# Altium PCB PCB.PcbDoc
Units mil, origin at the board's own origin, x right, y up, seen from the top; angles counter-clockwise.
Board outline 2269.48 x 3798.77 mil, 2 copper layers (Top Layer, Bottom Layer); 58 components, 64 nets, 420 pads, 139 vias.
Unrouted connection lines stored in the file: 11.
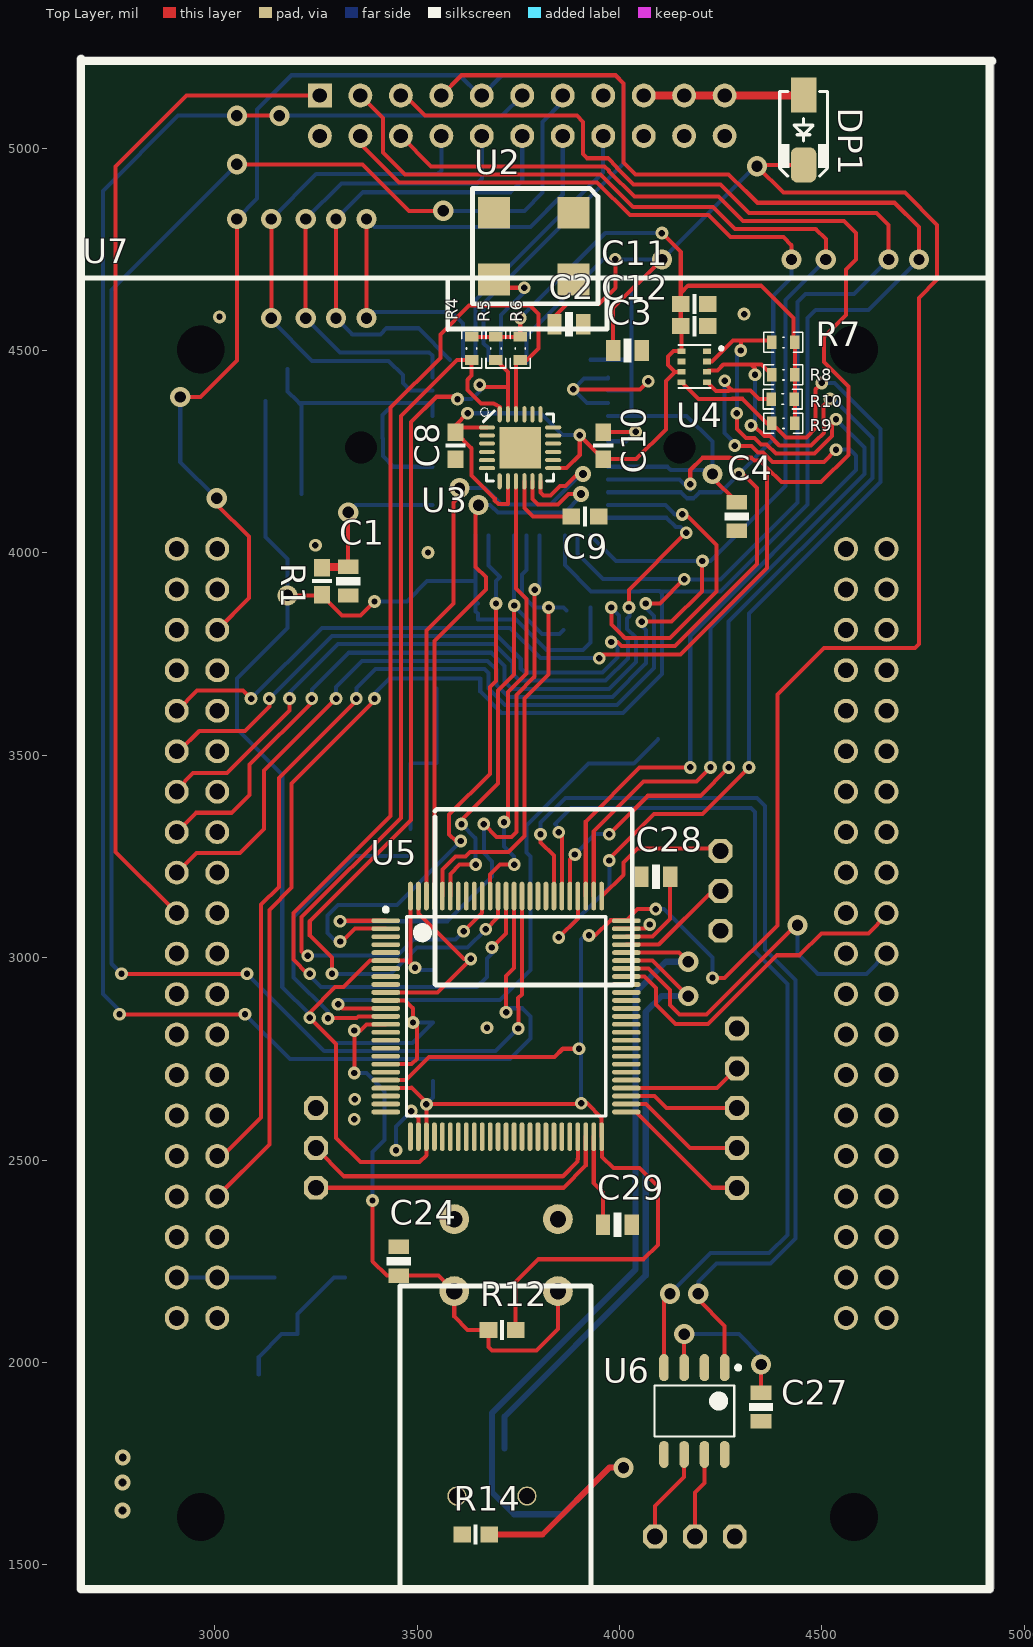
[diagram p0: Top Layer view]
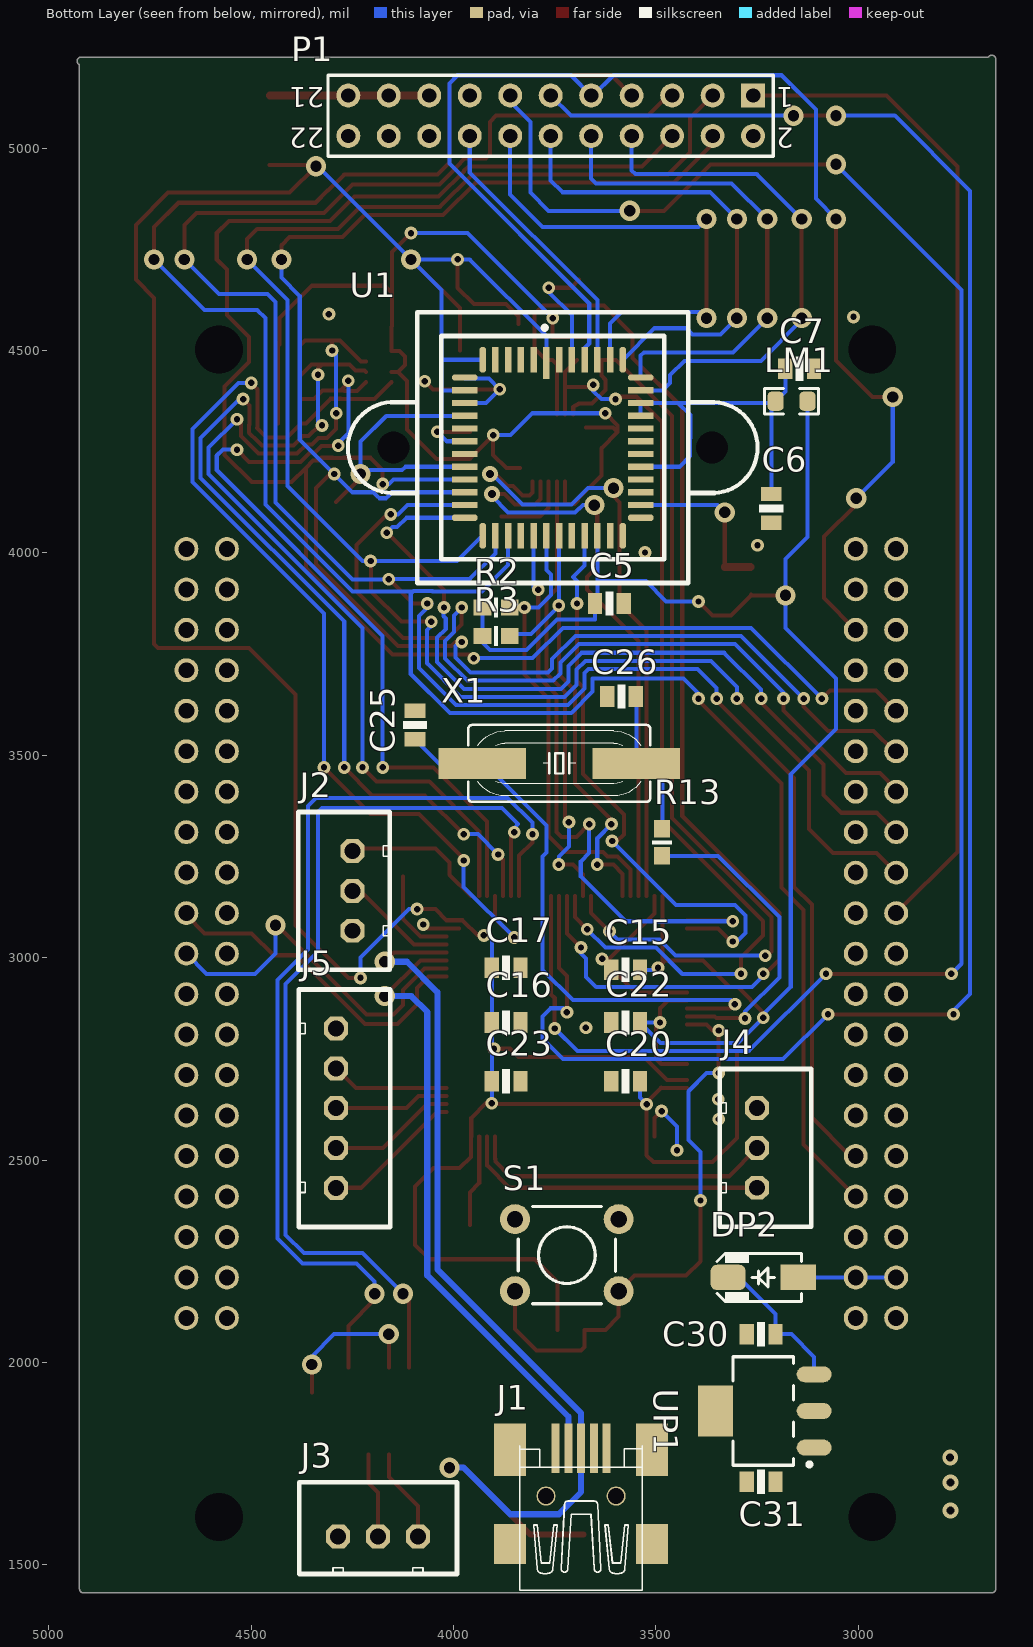
[diagram p1: Bottom Layer view, seen from below]

## Layer stack, top to bottom
Top Solder: solder mask 0.4, Solder Resist, Dk 3.5
Top Layer: signal copper 1.4
Dielectric 1: dielectric 12.6, FR-4, Dk 4.8
Bottom Layer: signal copper 1.4
Bottom Solder: solder mask 0.4, Solder Resist, Dk 3.5

## Board outline
2660.38,1440.71 ccw(c2670.24,1440.71) 2670.24,1430.85 4914.33,1430.85 ccw(c4914.33,1440.71) 4924.19,1440.71 4924.19,5206.08 ccw(c4920,5215) 4929.86,5215 ccw(c4920,5215) 4920,5224.86 2678.68,5224.86 ccw(c2670.24,5219.76) 2660.38,5219.76

## Design rules (kind name [scope] priority, off if disabled: settings)
Clearance [All] p1: gap=10 ignorepadtopadclearanceinfootprint=FALSE except(0: Arc-Hole Track-Hole SMDPad-Hole THPad-Hole Via-Hole Fill-Hole Poly-Hole Region-Hole Text-Hole)
DiffPairsRouting [All] p1: maxlimit=10 minlimit=10 mostfreqgap=10 toplayer_minwidth=10 toplayer_maxwidth=15 toplayer_prefwidth=15 bottomlayer_minwidth=15 bottomlayer_maxwidth=15 bottomlayer_prefwidth=15 maxuncoupledlength=500
PolygonConnect [All] p1: connectstyle=Relief reliefconductorwidth=10 reliefentries=4 polygonreliefangle="90 Angle" airgapwidth=10
RoutingVias [All] p1: holewidth=28 width=50 viastyle="Through Hole" minholewidth=28 minwidth=50 maxholewidth=28 maxwidth=50
SolderMaskExpansion [All] p1: expansion=4
Width [All] p1: maxlimit=10 minlimit=10 preferedwidth=10
29 further rules are at their usual default settings.

## Classes and differential pairs
component class Camera_Schematics: C1 C2 C3 C4 C5 C6 C7 DP1 LM1 P1 R1 R2 R3 U1 U2
component class IMU_Schematics: C8 C9 C10 C11 C12 R4 R5 R6 R7 R8 R9 R10 U3 U4
component class STM32F4_Schematics: C15 C16 C17 C20 C22 C23 C24 C25 C26 C27 C28 C29 J1 J2 J3 J4 J5 R12 R13 R14 S1 U5 U6 X1
component class USB3_Controller_Schematics: C30 C31 DP2 U7 UP1
differential pair USB: +USB_P -USB_N

## Components (designator, comment, footprint, x,y, rotation, side; value= is the part's Value field where it differs from the comment)
C1 "Cap" _0805 3330,3930 r270 top value=100nF
C2 "Cap" _0805 3875,4565 r180 top value=100nF
C3 "Cap" _0805 4020,4500 r180 top value=100nF
C4 "Cap" _0805 4290,4090 r90 top value=100nF
C5 "Cap" _0805 3615,3875 r0 bottom value=100nF
C6 "Cap" _0805 3215,4110 r90 bottom value=100nF
C7 "Cap" _0805 3145,4454.76 r0 bottom value=100nF
C8 "Cap" _0603 3595,4265 r90 top value=100nF
C9 "Cap" _0603 3915,4090 r180 top value=100nF
C10 "Cap" _0603 3960,4265 r270 top value=100nF
C11 "Cap" _0603 4185,4560 r0 top value=100nF
C12 "Cap" _0603 4185,4615 r0 top value=100nF
C15 "Cap" _0805 3575,2970 r180 bottom value=100nF
C16 "Cap" _0805 3870,2840 r0 bottom value=100nF
C17 "Cap" _0805 3870,2975 r0 bottom value=100nF
C20 "Cap" _0805 3575,2695 r180 bottom value=100nF
C22 "Cap" _0805 3575,2840 r180 bottom value=1uF
C23 "Cap" _0805 3870,2695 r0 bottom value=100nF
C24 "Cap" _0805 3455,2250 r90 top value=100nF
C25 "Cap" _0805 4095,3575 r90 bottom value=27PF
C26 "Cap" _0805 3585,3645 r0 bottom value=27PF
C27 "Cap" _0805 4350,1890 r90 top value=100nF
C28 "Cap" _0805 4090,3200 r0 top value=100nF
C29 "Cap" _0805 3995,2340 r180 top value=100nF
C30 "Cap" _0805 3240,2070 r0 bottom value=100nF
C31 "Cap" _0805 3240,1705 r180 bottom value=100nF
DP1 "1N5819" 430X270D 4455,5045 r270 top
DP2 "1N5819" 430X270D 3235,2210 r0 bottom
J1 "Mini_USB" My_USB 3685,1670 r90 bottom
J2 "SWD" XH_3PIN 4157.48,2970.12 r90 bottom
J3 "XH_3PIN" XH_3PIN 4381.46,1477.48 r180 bottom
J4 "AUX_UART" XH_3PIN 3342.52,2724.88 r270 bottom
J5 "AUX_SPI" XH_5PIN 4382.52,2921.46 r270 bottom
LM1 "10uH" 0805L 3165,4374.76 r0 bottom value=FB805
P1 "FPGA VIDEO" HDR2X11 3260,5130 r0 bottom
R1 "Resistor" _0603 3265,3930 r270 top value=100K
R2 "Resistor" _0603 3895,3865 r0 bottom value=1.5K
R3 "Resistor" _0603 3895,3795 r0 bottom value=1.5K
R4 "10k" RES0603 3635,4505 r90 top
R5 "10k" RES0603 3695,4505 r90 top
R6 "10k" RES0603 3755,4505 r90 top
R7 "4.7k" RES0603 4405,4520 r180 top
R8 "4.7k" RES0603 4405,4440 r180 top
R9 "4.7k" RES0603 4405,4320 r180 top
R10 "4.7k" RES0603 4403.54,4380 r180 top
R12 "Resistor" _0603 3710,2080 r180 top value=100K
R13 "Resistor" _0603 3485,3285 r270 bottom value=220R
R14 "Resistor" _0603 3645,1575 r180 top value=1K
S1 "PushButton-4Pin" _TACTILE_SWITCH_PTH_6.0MM 3720,2265 r0 bottom
U1 "MT9V034" MT9V034 3755,4260 r180 bottom
U2 "XTALL_SMD" XTAL_SMD 3886.85,4840.35 r180 top
U3 "MPU-9250" _QFN-24-EP 3754.21,4260.39 r0 top
U4 "BMP280" *XDCR_BMP280 4185,4460 r0 top
U5 "STM32F407VGT6" STM-LQFP100_N 3720,2855 r0 top
U6 "TJA1051" SO-8N 4185,1880 r270 top
U7 "EZ_FX3" EZ_FX3 2906.46,2110 r0 top locked
UP1 "LM1117IMP-x.x" SOT223_4 3235,1880.12 r0 bottom
X1 "Crystal_1" _CRYSTAL-HC49UP 3738.68,3480 r0 bottom value=8MHZ

## Footprints (in the part's own frame and the unit in brackets; to place one, negate y for a bottom-side part, rotate by r counter-clockwise, add the part's x,y. Pads: shape width x height; smd on the part's side, far side on the other; paste and mask are expansions set on the pad)
430X270D [mm] "SMA Molded Diode, 2-Leads, Body 4.3x2.7mm"
  rect 2.2x1.6 smd: 1(-2.2,0)
  rrect50% 2.2x1.6 smd: 2(2.2,0)
  silkscreen extent -2.4,-1.5 2.9,1.5, body extent -2.75,-1.4 2.75,1.4, height 2.6
0805L [mm] ",0805, 2012, 200X130"
  rrect50% 1x1.2 smd mask+0.075: 1(-1,0) 2(1,0)
  Top Layer pour cut-out: -0.5,0.8 0.5,0.8 0.5,-0.8 -0.5,-0.8
  silkscreen extent -1.7,-0.8 1.7,0.8, body extent -1,-0.6 1,0.6, height 0.95
*XDCR_BMP280 [mm]
  rect 0.5x0.35 smd: 1(0.8,0.975) 2(0.8,0.325) 3(0.8,-0.325) 4(0.8,-0.975) 5(-0.8,-0.975) 6(-0.8,-0.325) 7(-0.8,0.325) 8(-0.8,0.975)
  silkscreen extent -1,-1.35 1.8,1.35
_0603 [mm]
  rect 1.1x1 smd: 1(-0.85,0) 2(0.85,0)
  silkscreen extent -0.13,-0.64 0.13,0.64
_0805 [mm]
  rect 0.9x1.3 smd: 1(-0.9,0) 2(0.9,0)
  silkscreen extent -0.25,-0.76 0.25,0.76
_CRYSTAL-HC49UP [mil]
  rect 216.54x76 smd: 1(-190,0) 2(190,0)
  silkscreen extent -225,-95 225,95
_QFN-24-EP [mil]
  rrect100% 40x10 smd: 1(-81.35,49.48) 2(-81.35,29.51) 3(-81.35,9.74) 4(-81.35,-11.32) 5(-81.35,-31.19) 6(-81.35,-51.05) 13(82.13,-51.05) 14(82.13,-31.19) 15(82.13,-11.32) 16(82.13,9.74) 17(82.13,29.51) 18(82.13,49.48)
  rrect100% 10x40 smd: 7(-49.87,-83.53) 8(-30,-83.53) 9(-10.14,-83.53) 10(10.93,-83.53) 11(30.69,-83.53) 12(50.66,-83.53) 19(50.66,81.95) 20(30.69,81.95) 21(10.93,81.95) 22(-10.14,81.95) 23(-30,81.95) 24(-49.87,81.95)
  rect 103x103 smd: P$1(0.79,-0.39)
  silkscreen extent -98,-83 83,98
_TACTILE_SWITCH_PTH_6.0MM [mil]
  round 74 hole 40: 1(-128,89) 2(128,89) 3(-128,-89) 4(128,-89)
  silkscreen extent -120,-120 120,120
EZ_FX3 [mm]
  round 1.5 hole 3: 2(1.5,-12.5) 2(1.5,60.76) 2(42.5,-12.5) 2(42.5,60.76)
  round 1.5 hole 1: 4(0,7.62) 5(0,10.16) 6(0,12.7) 7(0,15.24) 8(0,17.78) 9(0,20.32) 10(0,22.86) 11(0,25.4) 12(0,27.94) 13(0,30.48) 14(0,33.02) 15(0,35.56) 16(0,38.1) 17(0,40.64) 18(0,43.18) 19(0,45.72) 20(0,48.26) 24(2.54,7.62) 25(2.54,10.16) 26(2.54,12.7) 27(2.54,15.24) 28(2.54,17.78) 29(2.54,20.32) 30(2.54,22.86) 31(2.54,25.4) 32(2.54,27.94) 33(2.54,30.48) 34(2.54,33.02) 35(2.54,35.56) 36(2.54,38.1) 38(2.54,43.18) 40(2.54,48.26) 43(42,5.08) 44(42,7.62) 45(42,10.16) 46(42,12.7) 47(42,15.24) 48(42,17.78) 49(42,20.32) 50(42,22.86) 51(42,25.4) 52(42,27.94) 53(42,30.48) 54(42,33.02) 55(42,35.56) 56(42,38.1) 57(42,40.64) 58(42,43.18) 59(42,45.72) 62(44.54,2.54) 64(44.54,7.62) 65(44.54,10.16) 66(44.54,12.7) 70(44.54,22.86) 71(44.54,25.4) 72(44.54,27.94) 74(44.54,33.02) 76(44.54,38.1) 77(44.54,40.64) 78(44.54,43.18) 79(44.54,45.72) GND(0,5.08) GND(2.54,5.08) GND(2.54,40.64) GND(2.54,45.72) GND(42,48.26) GND(44.54,15.24) GND(44.54,17.78) GND(44.54,20.32) GND(44.54,30.48) GND(44.54,35.56) GND(44.54,48.26) NC(44.54,5.08) V_1.2v(0,0) V_1.2v(42,0) V_3.3v(2.54,0) V_3.3v(44.54,0) V_BUS(0,2.54) V_BUS(2.54,2.54) VIO(42,2.54)
  silkscreen extent -6,-17 51,65.26
HDR2X11 [mm] "Connector; Header; 11x2 Position"
  rect 1.5x1.5 hole 0.9: 1(0,0)
  round 1.5 hole 0.9: 2(0,2.54) 3(2.54,0) 4(2.54,2.54) 5(5.08,0) 6(5.08,2.54) 7(7.62,0) 8(7.62,2.54) 9(10.16,0) 10(10.16,2.54) 11(12.7,0) 12(12.7,2.54) 13(15.24,0) 14(15.24,2.54) 15(17.78,0) 16(17.78,2.54) 17(20.32,0) 18(20.32,2.54) 19(22.86,0) 20(22.86,2.54) 21(25.4,0) 22(25.4,2.54)
  silkscreen extent -1.27,-1.27 26.67,3.81
MT9V034 [mm]
  rect 0.4x2 smd: 1(-0.4,5.315)
  rect 0.4x1.6 smd: 2(-1.2,5.515) 3(-2,5.515) 4(-2.8,5.515) 5(-3.6,5.515) 20(-3.6,-5.515) 21(-2.8,-5.515) 22(-2,-5.515) 23(-1.2,-5.515) 24(-0.4,-5.515) 25(0.4,-5.515) 26(1.2,-5.515) 27(2,-5.515) 28(2.8,-5.515) 29(3.6,-5.515) 44(3.6,5.515) 45(2.8,5.515) 46(2,5.515) 47(1.2,5.515) 48(0.4,5.515)
  oct 0.4x1.6 smd: 6(-4.4,5.515) 19(-4.4,-5.515) 30(4.4,-5.515) 43(4.4,5.515)
  oct 1.6x0.4 smd: 7(-5.515,4.4) 18(-5.515,-4.4) 31(5.515,-4.4) 42(5.515,4.4)
  rect 1.6x0.4 smd: 8(-5.515,3.6) 9(-5.515,2.8) 10(-5.515,2) 11(-5.515,1.2) 12(-5.515,0.4) 13(-5.515,-0.4) 14(-5.515,-1.2) 15(-5.515,-2) 16(-5.515,-2.8) 17(-5.515,-3.6) 32(5.515,-3.6) 33(5.515,-2.8) 34(5.515,-2) 35(5.515,-1.2) 36(5.515,-0.4) 37(5.515,0.4) 38(5.515,1.2) 39(5.515,2) 40(5.515,2.8) 41(5.515,3.6)
  round 0 hole 2: ""(-10,0) ""(10,0)
  silkscreen extent -12.86,-8.5 12.86,8.5
My_USB [mm]
  rect 3.1x0.5 smd: 1(3,1.6) 2(3,0.8) 3(3,0) 4(3,-0.8) 5(3,-1.6)
  rect 2.5x2 smd: 5(-3,-4.45) 5(-3,4.45)
  rect 3.3x2 smd: 5(2.9,-4.45) 5(2.9,4.45)
  round 1.2 hole 1 unplated: ""(0,-2.2) ""(0,2.2)
  silkscreen extent -5.92,-3.85 3.16,3.85
RES0603 [mm] "Chip Resistor, 2-Leads, Body 1/60x0/80mm, IPC Medium Density DESIGNER:ABBAS BASEREH"
  rect 0.6x0.85 smd: 1(-0.725,0) 2(0.725,0)
  silkscreen extent -1.22,-0.63 1.22,0.63, body extent -0.82,-0.43 0.82,0.43, height 0.4
SO-8N [mm] "SOIC, 8-Leads, Body 4/89x3/90mm, Pitch 1/27mm, IPC Medium Density designer:abbas basereh"
  oval 1.7x0.6 smd mask+0.06: 1(-2.725,1.905) 2(-2.725,0.635) 3(-2.725,-0.635) 4(-2.725,-1.905) 5(2.725,-1.905) 6(2.725,-0.635) 7(2.725,0.635) 8(2.725,1.905)
  silkscreen extent -2.85,-2.5 1.6,2.88, body extent -3,-2.5 3,2.5, height 1.5
SOT223_4 [mm] "SOT223, 4-Leads, Body 6.5x3.5mm, Pitch 2.30mm-Designer Abbas Basereh"
  oval 2.2x1 smd: 1(-3.2,2.3) 2(-3.2,0) 3(-3.2,-2.3)
  rect 2.2x3.2 smd: 4(3,0)
  Top Layer pour cut-out: -1.7,3.556 1.7,3.556 1.7,-3.556 -1.7,-3.556
  silkscreen extent -3.02,-3.4 1.9,3.47, body extent -3.5,-3.25 3.5,3.25, height 1.7
STM-LQFP100_N [mm] "Thin QFP, 100-Leads, Body 14x14mm, Pitch 0.5mm, IPC Medium Density"
  oval 1.8x0.3 smd: 1(-7.55,6) 2(-7.55,5.5) 3(-7.55,5) 4(-7.55,4.5) 5(-7.55,4) 6(-7.55,3.5) 7(-7.55,3) 8(-7.55,2.5) 9(-7.55,2) 10(-7.55,1.5) 11(-7.55,1) 12(-7.55,0.5) 13(-7.55,0) 14(-7.55,-0.5) 15(-7.55,-1) 16(-7.55,-1.5) 17(-7.55,-2) 18(-7.55,-2.5) 19(-7.55,-3) 20(-7.55,-3.5) 21(-7.55,-4) 22(-7.55,-4.5) 23(-7.55,-5) 24(-7.55,-5.5) 25(-7.55,-6) 51(7.55,-6) 52(7.55,-5.5) 53(7.55,-5) 54(7.55,-4.5) 55(7.55,-4) 56(7.55,-3.5) 57(7.55,-3) 58(7.55,-2.5) 59(7.55,-2) 60(7.55,-1.5) 61(7.55,-1) 62(7.55,-0.5) 63(7.55,0) 64(7.55,0.5) 65(7.55,1) 66(7.55,1.5) 67(7.55,2) 68(7.55,2.5) 69(7.55,3) 70(7.55,3.5) 71(7.55,4) 72(7.55,4.5) 73(7.55,5) 74(7.55,5.5) 75(7.55,6)
  oval 0.3x1.8 smd: 26(-6,-7.55) 27(-5.5,-7.55) 28(-5,-7.55) 29(-4.5,-7.55) 30(-4,-7.55) 31(-3.5,-7.55) 32(-3,-7.55) 33(-2.5,-7.55) 34(-2,-7.55) 35(-1.5,-7.55) 36(-1,-7.55) 37(-0.5,-7.55) 38(0,-7.55) 39(0.5,-7.55) 40(1,-7.55) 41(1.5,-7.55) 42(2,-7.55) 43(2.5,-7.55) 44(3,-7.55) 45(3.5,-7.55) 46(4,-7.55) 47(4.5,-7.55) 48(5,-7.55) 49(5.5,-7.55) 50(6,-7.55) 76(6,7.55) 77(5.5,7.55) 78(5,7.55) 79(4.5,7.55) 80(4,7.55) 81(3.5,7.55) 82(3,7.55) 83(2.5,7.55) 84(2,7.55) 85(1.5,7.55) 86(1,7.55) 87(0.5,7.55) 88(0,7.55) 89(-0.5,7.55) 90(-1,7.55) 91(-1.5,7.55) 92(-2,7.55) 93(-2.5,7.55) 94(-3,7.55) 95(-3.5,7.55) 96(-4,7.55) 97(-4.5,7.55) 98(-5,7.55) 99(-5.5,7.55) 100(-6,7.55)
  silkscreen extent -7.67,-6.25 6.25,6.82, body extent -7,-7 7,7, height 1.6
XH_3PIN [mm]
  oct 1.5x1.5 hole 1: 1(2.45,2.35) 2(4.95,2.35) 3(7.45,2.35)
  silkscreen extent 0,0 9.9,5.75
XH_5PIN [mm]
  oct 1.5x1.5 hole 1: 1(2.45,2.35) 2(4.95,2.35) 3(7.45,2.35) 4(9.95,2.35) 5(12.45,2.35)
  silkscreen extent 0,0 14.9,5.75
XTAL_SMD [mm]
  rect 2x2 smd: 1(0,0) 2(5,0) 3(5,4.2) 4(0,4.2)
  silkscreen extent -1.52,-1.52 6.35,5.72

## Part data
C1 C2 C3 C4 C5 C6 C7 C8 C9 C10 C11 C12 C15 C16 C17 C20 C22 C23 C24 C25 C26 C27 C28 C29 C30 C31: library part Cap_1
DP1 DP2: "Schottkey Rectifiers", Data=16-12-2016, Designer="Abbas Basereh"
J1: "USB 2.0, Right Angle, SMT, B Type, Receptacle, 5 Position, Black", PackageDocument=27-Jun-2003, ComponentLink1Description="Manufacturer Link", ComponentLink1URL=http://www.tycoelectronics.com/, ComponentLink2Description="Packaging Specification", ComponentLink2URL=http://ecommas.tycoelectronics.com/commerce/DocumentDelivery/DDEController?Action=showdoc&DocId=Customer+Drawing%7F440247%7FD%7Fpdf%7FEnglish%7FC_440247_D.pdf, ContactMaterial="Copper Alloy", ContactPlating="Gold (30)", DatasheetDocument=27-Jun-2003, DrillSize="Corresponds to nominal value.", HousingMaterial=Thermoplastic, PackageReference=440247, PanelGround=Without, PCB_Layout="Complies with manufacturer's recommendation.", Published=15-Jul-2004, Publisher="Altium Limited"
J2 J4: library part XH_3PIN
J5: library part XH_5PIN
LM1: library part "L SMA 0.25W", "Inductor", Code_IEC=1005, Code_JEITA=0402, LatestRevisionDate=29-May-2009, LatestRevisionNote="IPC-7351 Footprint Added.", PackageDescription="Chip Inductor", PackageReference=0402-A, Published=8-Jun-2000, Publisher="Altium Limited"
P1: library part "Header 11X2", "Header, 11-Pin, Dual row", LatestRevisionDate=17-Jul-2002, LatestRevisionNote="Re-released for DXP Platform.", Publisher="Altium Limited"
R4 R5 R6 R7 R8 R9 R10: library part "RES SMD PACKAGE", "TOTAL SMD RESISTOR PACK", Data=2017-3-10, Desc.="RES SMD PAKAGES", Designer="Abbas Basereh"
U2: library part XTAL_SMD
U4: "BMP280 Absolute Barometric Pressure Sensor for Battery Powered Devices 2 x 2.5mm", Package="SMD-8 Bosch Tools", Availability=Unavailable, MF=Bosch, MP=BMP280, Price=None, SnapEDA_Link=https://www.snapeda.com/parts/BMP280/Bosch%20Sensortec/view-part/?ref=snap
U5: "ARM Cortex-M4 32-bit MCU+FPU, 210 DMIPS, 1024 kB Flash, 192 kB Internal RAM, 82 I/Os, 100-pin LQFP, -40 to 85 degC, Tray", I/Os (High Current)=82, Manufacturer=STMicroelectronics, Operating Frequency(F) (Processor speed) (MHz)=168, Supplier Part Number 1=497-11605-ND, Supply Voltage(Vcc) max (V)=3.6, Supply Voltage(Vcc) min (V)=1.8, ComponentLink1Description="Manufacturer URL", ComponentLink1URL=http://www.st.com/web/en/home.html, ComponentLink2Description=Datasheet, ComponentLink2URL=http://www.st.com/st-web-ui/static/active/en/resource/technical/document/datasheet/DM00037051.pdf, ComponentLink3Description="Package Specification", ComponentLink3URL=http://www.st.com/st-web-ui/static/active/en/resource/technical/document/data_brief/DM00071938.pdf, Core="ARM Cortex-M4", D/A Converter=2x12-bit, DatasheetVersion="Rev. 4", FLASH Size (Prog) (kB)=1024, Internal RAM Size (kB)=192, Mounting Technology="Surface Mount", PackageDescription="100-Pin Low Profile Quad Flat Package, 14 x 14 mm Body, 0.5 mm Pitch", PackageReference=LQFP100, PackageVersion="Rev. 1, 06/2013", Packing=Tray, PartNumber=STM32F407VGT6, Supplier 1=Digi-Key, Supplier 2=Farnell, Supplier 3=Newark, Supplier 4=Mouser, Supplier Part Number 2=2064368, Supplier Part Number 3=73T2333, Supplier Part Number 4=511-STM32F407VGT6
UP1: "x.x Volt, 800mA Low-Dropout Linear Regulator, 4-pin SOT-223", Data=16-12-2016, Designer="Abbas Basereh"
S1: PROD_ID=SWCH-13065
U3: PROD_ID=IC-13192

## Via types
v1: diameter 31.5, hole 15.75, Top Layer to Bottom Layer, 100 vias
v2: diameter 50, hole 28, Top Layer to Bottom Layer, 34 vias
v3: diameter 39.37, hole 19.68, Top Layer to Bottom Layer, 5 vias

## Nets (pads, with @x,y where several pads share a name; then routed paths per layer and width w, separated by ;. In a path a pad name is that pad's centre, name@x,y a point inside that pad or via, vN(x,y) a via of type N, cw(c..) or ccw(c..) an arc to the next point about the centre after c; other vN are vias at no path point)
5V: C27.2 U6.3 | length 385.1
  Top Layer w10: U6.3 v2(4160,2070) ; C27.2 v2(4350,1995)
  Bottom Layer w10: v2(4160,2070) 4295,2070 4350,2015 v2(4350,1995)
+5: C30.1 DP2.2 UP1.3 | length 366.2
  Bottom Layer w10: UP1.3 3109.02,2014.02 3165,2070 C30.1 3204.57,2119.57 3295,2210 DP2.2
AUX_CS: J5.5 U5.51 | length 350.3
  Top Layer w10: U5.51 4041.22,2618.78 4228.43,2431.57 J5.5@4290,2431.57
AUX_MISO: J5.3 U5.53 | length 285.1
  Top Layer w10: U5.53 4086.85,2658.15 4116.57,2628.43 J5.3@4290,2628.43
AUX_MOSI: J5.2 U5.54 | length 293.1
  Top Layer w10: U5.54 4240.98,2677.83 J5.2@4290,2726.85
AUX_RXD: J4.3 U5.48 | length 760.5
  Top Layer w10: J4.3 3861.57,2431.57 3916.54,2486.54 3916.54,2486.85 ; 3916.85,2486.85 U5.48
AUX_SCK: J5.4 U5.52 | length 317.7
  Top Layer w10: U5.52 4065.54,2638.46 4174,2530 J5.4@4290,2530
AUX_TXD: J4.2 U5.47 | length 752
  Top Layer w10: J4.2 3320,2460 3860,2460 3896.85,2496.85 3896.85,2502.17 ; 3897.17,2502.17 U5.47
BAR_CS: R7.2 U4.2 U5.77 | length 2292.4
  Top Layer w10: U5.77 3936.54,3311.54 4060,3435 4190,3435 v1(4225,3470) ; U4.2 4228.85,4472.8 4281.06,4525 4300,4525 ; v1(4290,4345) 4290,4306.52 4312.26,4284.25 4334.16,4284.25 4350.15,4268.27 4363.3,4268.27 4386.57,4245 4481.57,4245 4504.25,4267.68 4504.25,4267.74 4522.26,4285.75 4522.32,4285.75 4525,4288.43 4525,4320 v1(4535,4330) ; v1(4300,4500) 4300,4525 ; R7.2@4376.46,4515 4366.46,4525 4300,4525
  Bottom Layer w10: v1(4225,3470) 4225,3815 4605,4195 4605,4260 v1(4535,4330) ; v1(4290,4345) 4290.75,4345.75 4290.75,4490.75 v1(4300,4500)
BAR_SCK: R10.2 U4.4 U5.78 | length 2152.5
  Top Layer w10: U5.78 3916.85,3336.85 4050,3470 v1(4175,3470) ; U4.4 4238.11,4400 4270,4400 4270.75,4400.75 ; v1(4260,4425) 4260,4420 4275,4405 4270.75,4400.75 ; v1(4285,4265) 4285.75,4264.25 4325.88,4264.25 4341.86,4248.27 4355.02,4248.27 4378.28,4225 4505,4225 v1(4535,4255) ; R10.2 4345,4380 4324.25,4400.75 4270.75,4400.75
  Bottom Layer w10: v1(4175,3470) 4175,3795 4585,4205 4585,4240 4570,4255 v1(4535,4255) ; v1(4260,4425) 4259.25,4424.25 4259.25,4295.75 4285,4270 v1(4285,4265)
BAR_SDI: R8.2 U4.3 U5.80 | length 2322.4
  Top Layer w10: U5.80 3877.48,3242.48 v1(3890,3255) ; v1(3975,3305) 4070,3400 4200,3400 v1(4270,3470) ; U4.3 4220.2,4450.91 4242.42,4450.91 4256.52,4465 4325,4465 ; v1(4325,4315) 4331.7,4315 4358.43,4288.27 4371.58,4288.27 4394.85,4265 4473.28,4265 4484.25,4275.97 4484.25,4276.02 4505,4296.77 4505,4316.52 4504.25,4317.26 4504.25,4364.25 v1(4520,4380) ; v1(4335,4440) 4335,4455 4325,4465 ; R8.2 4351.46,4465 4325,4465
  Bottom Layer w10: v1(3890,3255) 3940,3305 v1(3975,3305) ; v1(4270,3470) 4270,3830 4625,4185 4625,4283.48 4528.48,4380 v1(4520,4380) ; v1(4325,4315) 4335,4325 v1(4335,4440)
BAR_SDO: R9.2 U4.5 U5.79 | length 2481.5
  Top Layer w10: v1(3850,3050) 3897.17,3097.17 U5.79 ; v1@3975,3245 4085,3355 4205,3355 v1(4320,3470) ; U4.5 4195.12,4380 4278.28,4380 4279.03,4380.75 4304.25,4380.75 4365,4320 R9.2 4411.46,4285 4461.77,4285 4485,4308.23 4484.25,4308.98 4484.25,4404.25 v1(4500,4420)
  Bottom Layer w10: v1(3850,3050) 3975,3175 v1(3975,3240) ; v1(4320,3470) 4320,3850 4645,4175 4645,4306 4531,4420 v1(4500,4420)
CAM_SCL: R3.1 U1.25 U5.95 | length 1167
  Top Layer w10: U5.95 3582.2,3207.2 3605,3230 v1(3645,3230) ; v1(3610,3330) 3610.02,3340.02 3700,3430 3700,3659.85 3740,3699.85 v1(3740,3870)
  Bottom Layer w10: v1(3610,3330) 3645,3295 v1(3645,3230) ; U1.25 3739.25,3882.46 3740,3881.72 v1(3740,3870) 3738.23,3870 3808.23,3800 3851.54,3800 R3.1@3861.54,3810
CAM_SDA: R2.1 U1.24 U5.96 | length 1177.8
  Top Layer w10: U5.96 3562.52,3217.52 3595,3250 3620,3250 3630.75,3260.75 3725.75,3260.75 3765.75,3300.75 3765.75,3640.75 3825,3700 v1(3825,3865)
  Bottom Layer w10: U1.24 3770.75,3957.75 3759.25,3946.25 3759.25,3895.75 3790,3865 v1(3825,3865) ; v1@3822.5,3857.5 3825,3860 v1(3825,3865) ; R2.1@3869.04,3857.5 R2.1 v1(3825,3865)
CAMERA_RESET: C1.1 R1.1 U1.32 | length 415.8
  Top Layer w10: R1.1 R1.1@3266.97,3965.43 ; C1.1 v2(3330,4100)
  Top Layer w19.68: R1.1@3266.97,3965.43 C1.1
  Bottom Layer w10: v2(3330,4100) 3348.27,4118.27 U1.32
CAN_RX: U5.81 U6.4 | length 2321.5
  Top Layer w10: v1@3845,3315 v1(3850,3310) ; U5.81 v1@3857.8,3310 ; U6.4 4110,2155 v2(4125,2170)
  Bottom Layer w10: v1(3850,3310) 3850,3320.75 3840.37,3330.37 3880,3370 4325,3370 4335,3360 4335,3015 4415,2935 4415,2315 4370,2270 4225,2270 v2(4125,2170)
CAN_TX: U5.82 U6.1 | length 2406.9
  Top Layer w10: v1(3805,3305) 3805,3285 3838.11,3251.89 U5.82 ; v2(4195,2170) 4195,2155 4260,2090 U6.1
  Bottom Layer w10: v1(3805,3305) 3805,3333.48 3866.52,3395 4340,3395 4360,3375 4360,3020 4435,2945 4435,2306.72 4373.28,2245 4240,2245 4195,2200 v2(4195,2170)
CD0: P1.16 U1.45 | length 683.8
  Bottom Layer w10: 3644.53,4625 3644.76,4624.76 ; U1.45 3644.76,4624.76 ; P1.16 3960,4940 3644.76,4624.76
CD1: P1.14 U1.44 | length 1262.2
  Top Layer w10: v2(3375,4580) v2(3375,4825)
  Bottom Layer w10: v2(3375,4580) 3390,4595 3585,4595 3613.27,4566.73 U1.44 ; v2(3375,4825) 3395,4805 3780,4805 3860,4885 P1.14
CD2: P1.12 U1.43 U7.19 | length 1199.2
  Top Layer w10: v2@3292,4580 v2(3300,4580) v2(3300,4825)
  Bottom Layer w10: v2(3300,4580) 3340,4540 3410,4540 3425,4555 3503.9,4555 U1.43 ; v2(3300,4825) 3366,4891 3731,4891 3760,4920 P1.12
CD3: P1.10 U1.42 U7.18 | length 1231.7
  Top Layer w10: v2(3225,4580) v2(3225,4825)
  Bottom Layer w10: v2(3225,4580) 3310,4495 3530,4495 3537.87,4487.13 U1.42 ; v2(3225,4825) 3313,4913 3648,4913 3660,4925 P1.10
CD4: P1.8 U1.41 U7.17 | length 1285.5
  Top Layer w10: v2(3140,4580) v2(3140,4825)
  Bottom Layer w10: v2(3140,4580) 3140,4575 3240.75,4474.25 3429.75,4474.25 3465,4439 3465,4420 3483.27,4401.73 U1.41 ; v2(3140,4825) 3251,4936 3551,4936 3560,4945 P1.8
CD5: P1.6 U1.15 U7.16 | length 4490
  Top Layer w10: U7.16 2956.46,3660 3070,3660 v1(3090,3640) ; P1.6 3535,4955 3963.28,4955 3974.14,4944.14 3974.14,4942.57 4036.72,4880 4245,4880 4305,4820 4555,4820 4585,4790 4585,4725 4560,4700 4560,4587.17 4505.63,4532.8 4505.63,4471.45 4565.75,4411.33 4565.75,4242.26 4498.48,4175 4400,4175 4365,4210 ; v1(3950,3740) 3959.25,3749.25 4151.25,3749.25 4365,3963 4365,4210 ; v1(4175,4170) 4175,4205 4205,4235 4271.52,4235 4272.26,4234.25 4297.74,4234.25 4298.48,4235 4326.85,4235 4333.58,4228.27 4346.73,4228.27 4365,4210
  Bottom Layer w10: v1(3090,3640) 3265,3815 3729.85,3815 3804.85,3740 3805.17,3740.32 v1@3945,3740.32 ; v1@3940,3735.32 v1@3945,3740.32 ; v1(3950,3740) 3945.32,3740 v1@3945.16,3740.16 ; U1.15 4148.74,4181.26 4175,4155 v1(4175,4170) ; v1@3945,3740.32 3945.32,3740.32 v1@3945.16,3740.16 ; v1@3945,3740.32 v1@3945.16,3740.16 ; v1@3945,3740.32 3945,3740 v1@3945.16,3740.16
CD6: P1.4 U1.16 U7.15 | length 4186
  Top Layer w10: U7.15 2912,3510 2962,3560 3075,3560 3135,3620 v1(3135,3640) ; P1.4 3367.5,5022.5 3367.5,5002.5 3455,4915 3945.15,4915 4025.86,4834.29 4220,4834.29 4274.29,4780 4405,4780 4425,4760 v2(4425,4725) ; v1(3980,3780) 3994.95,3780 4004.95,3770 4137,3770 4340,3973 4340,4160 4305,4195 v1(4295,4195)
  Bottom Layer w10: v1(3135,3640) 3290,3795 3628.86,3795 ; 3631,3795 3698.57,3795 3756.25,3737.32 3756.25,3714.75 3766.75,3704.25 3957.74,3704.25 3995,3741.52 3995,3770 3985,3780 v1(3980,3780) ; U1.16 4151.75,4149.76 4162.26,4139.25 4162.46,4139.25 4166.72,4135 4183.28,4135 4187.54,4139.25 4187.74,4139.25 4198.25,4149.76 4249.76,4149.76 v1(4295,4195) 4380,4280 4380,4635 4425,4680 v2(4425,4725)
CD7: P1.2 U1.17 U7.14 | length 2300.5
  Top Layer w10: U7.14 2906.46,3415.46 2947,3456 3030,3456 3185,3611 v1(3185,3640) ; v1(3980,3865) 3980,3823.23 3992.48,3810.75 3992.74,3810.75 4010.75,3792.74 4010.75,3792.48 4013.23,3790 4125,3790 4240,3905 4240,4020 4165,4095 v1(4155,4095)
  Bottom Layer w10: v1(3185,3640) 3185,3655 3305,3775 3690.28,3775 3736.25,3729.03 3736.25,3701.75 3753.75,3684.25 3966.02,3684.25 4020.75,3738.98 4020.75,3782.74 3999.25,3804.23 3999.25,3845.75 v1(3980,3865) ; U1.17 4113.45,4118.27 4136.72,4095 v1(4155,4095)
CD8: P1.1 U1.18 U7.13 | length 4555.2
  Top Layer w10: 2906.46,3110 2755,3261.46 2755,4955 2930,5130 P1.1 ; U7.13 2954.46,3358 3042,3358 3086,3402 3086,3477 3240,3631 v1(3240,3640) ; v1(4023.5,3865) 4023.5,3908.5 v1(4165,4050)
  Bottom Layer w10: v1@3240,3635 v1(3240,3640) 3240,3662 3331.28,3753.28 3683.72,3753.28 3716.25,3720.75 3716.25,3682.03 3734.03,3664.25 3974.3,3664.25 4040.75,3730.7 4040.75,3791.02 4019.25,3812.52 4019.25,3837.74 4025,3843.48 4025,3863.5 v1(4023.5,3865) ; U1.18 4116.66,4086.77 4139.18,4064.25 4150.75,4064.25 v1(4165,4050)
CD9: P1.3 U1.19 U7.12 | length 4533.2
  Top Layer w10: U7.12 2955.46,3259 3063,3259 3122,3318 3122,3462 v1(3300,3640) ; P1.3 3415.47,5074.53 3415.47,4989.53 3470,4935 3953.43,4935 4034.14,4854.29 4230.71,4854.29 4285,4800 4485,4800 4510,4775 v2(4510,4725) ; v1(4055,3830) 4129,3830 4204,3905 4204,3974 4210,3980 v1(4205,3980)
  Bottom Layer w10: v1@3300,3630 v1(3300,3640) 3300,3669 3364.28,3733.28 3674.53,3733.28 3696.25,3711.57 3696.25,3673.75 3725.75,3644.25 3982.59,3644.25 4065.75,3727.41 4065.75,3809.25 4055,3820 v1(4055,3830) ; U1.19 3991.1,3980 v1(4205,3980) 4225,3980 4410,4165 4410,4625 v2(4510,4725)
CEXPOS: U1.23 U5.1 | length 1536.3
  Top Layer w10: v1(3310,3090) 3311.22,3091.22 U5.1 ; v1(3665,3330) 3696.79,3298.21 3733.21,3298.21 3745.75,3310.75 3745.75,3649.03 3790.75,3694.03 v1(3790.75,3909.25) v1@3794.5,3913
  Bottom Layer w10: v1(3310,3090) 3575,3090 3685.75,3200.75 3685.75,3237.74 3665,3258.48 v1(3665,3330) ; v1(3790.75,3909.25) 3797,3909.25 3802.24,3914.5 U1.23
CFV: P1.7 U1.21 U7.24 | length 5565.6
  Top Layer w10: U7.24 3135,2538.54 3135,3118 3190,3173 3190,3430 v1@3395,3635 ; P1.7 3610,5180 3990,5180 4010,5160 4010,4965 4040,4935 4270,4935 4310,4895 4310.86,4895 4340.86,4865 4680,4865 4740,4805 v2(4740,4725)
  Bottom Layer w10: v1@3395,3635 v1(3395,3640) 3395,3653 3432,3690 3656.25,3690 3656.25,3657.18 3709.18,3604.25 4009.25,3604.25 4105.75,3700.75 4105.75,3899.25 4100.75,3904.25 ; U1.21 3865.24,3969.76 3930,3905 4051.52,3905 4052.26,3905.75 4099.25,3905.75 4100.75,3904.25 ; v2(4740,4725) 4615,4600 4485,4600 4465,4580 4465,4120 4249.25,3904.25 4100.75,3904.25
CLED: U1.27 U5.2 | length 1451.8
  Top Layer w10: v1(3310,3040) 3315,3040 3346.54,3071.54 U5.2 ; v1(3608.26,3288.26) 3595.74,3288.26 3579.25,3304.75 3579.25,3353.25 3680,3454 3680,3668.14 3695,3683.14 v1(3695,3875)
  Bottom Layer w10: v1(3310,3040) 3300,3040 3279.25,3060.75 3279.25,3104.25 3305,3130 3450,3130 v1(3608.26,3288.26) ; U1.27 3676.26,3968.74 3705,3940 3695,3930 v1(3695,3875)
CLV: P1.5 U1.20 U7.25 | length 5387.6
  Top Layer w10: U7.25 3020,2510 3115,2605 3115,3131 3159,3175 3159,3444 v1@3350,3635 ; P1.5 3470,5130 3520,5080 3895,5080 3910,5065 3910,4985 3920,4975 3971.57,4975 3994.14,4952.43 3994.14,4950.86 4035,4910 4250,4910 4320,4840 4635,4840 4665,4810 v2(4665,4725) ; v1(4065,3875) 4100,3875 v1(4160,3935)
  Bottom Layer w10: v1@3350,3635 v1(3350,3640) 3350,3666 3397.28,3713.28 3666.25,3713.28 3676.25,3703.28 3676.25,3665.47 3717.46,3624.25 3994.25,3624.25 4085.75,3715.75 4085.75,3844.25 4055,3875 v1(4065,3875) ; U1.20 3896.73,3998.27 3960,3935 v1(4160,3935) 4160.75,3934.25 4249.25,3934.25 4440,4125 4440,4620 4460,4640 4580,4640 v2(4665,4725)
CPCLK: P1.9 U1.46 U7.38 | length 3316.5
  Top Layer w10: v2(2915,4385) 2965,4385 3055,4475 v2(3055,4825) ; v2(3005,4135) 3005,4120 3085,4040 3085,3888.54 U7.38
  Bottom Layer w10: v2(2915,4385) 2915,4225 v2(3005,4135) ; v2(3055,4825) 3105,4875 3105,5095 3190,5180 3605,5180 3655,5130 P1.9 3710,5180 3990,5180 4010,5160 4010,4961.72 3664.76,4616.48 3664.76,4517.71 3676.26,4506.21 U1.46
FPGA_RXD: P1.13 U5.86 | length 4634.6
  Top Layer w10: v1(2770,2960) v1(3080,2960) ; v2(3055,4960) 3365,4960 3480,4845 v2(3565,4845) ; v1(3750,2825) 3750.75,2825.75 3750.75,2877.74 3750,2878.48 3750,2900 3759.37,2909.37 U5.86
  Bottom Layer w10: v1(2770,2960) 2745,2985 2745,4650 v2(3055,4960) ; v1(3080,2960) 3270.75,2769.25 3694.25,2769.25 v1(3750,2825) ; v2(3565,4845) 3765,4845 3810,4890 3810,5065 3860,5115 P1.13
FPGA_TXD: P1.11 U5.87 | length 4689.9
  Top Layer w10: v1(2765,2860) v1(3075,2860) ; v2(3055,5080) v2(3160,5080) ; v1(3720,2865) 3720,2955 3739.37,2974.37 3739.37,3040 3739.68,3040.31 U5.87
  Bottom Layer w10: v1(2765,2860) 2765,2870 2724.25,2910.75 2724.25,4894.25 2910,5080 v2(3055,5080) ; v1(3075,2860) 3185.75,2749.25 3729.25,2749.25 3780.75,2800.75 3780.75,2854.25 3760,2875 3730,2875 v1(3720,2865) ; v2(3160,5080) 3710,5080 P1.11
GND: C1.2 C2.1 C3.1 C4.1 C5.1 C6.1 C7.1 C8.1 C9.1 C10.1 C11.2 C12.2 C15.1 C16.1 C17.1 C20.1 C22.1 C23.1 C24.2 C25.2 C26.2 C27.1 C28.1 C29.1 C30.2 C31.2 J1.4 J1.5 J2.1 J3.1 J4.1 J5.1 P1.18 P1.20 P1.22 S1.3 S1.4 U1.7 U1.9 U1.11 U1.12 U1.13 U1.29 U1.30 U1.31 U1.33 U1.34 U1.38 U1.48 U2.2 U3.18 U3.20 U4.1 U4.7 U5.10 U5.20 U5.27 U5.74 U5.94 U5.99 U6.2 U6.8 U7.GND UP1.1 | length 1290.3
  Top Layer w10: U5.10 3550.06,2914.06 v1(3633,2997) 3616,2997 3503.46,3109.54 U5.99 ; v1(3486,2621) 3503.46,2603.54 U5.27 ; v1(3886,4404) 4051,4404 v1(4071,4424) ; C10.1 4039.46,4298.46 v1(4040,4299) ; U5.74@3986.6,3071.54 U5.74 4064.54,3071.54 v1(4075,3082)
  Bottom Layer w10: v1(3448,2524) 3448,2583 v1(3486,2621) ; U1.12 4016.75,4275.75 v1(4040,4299) ; U1.9 3919.76,4370.24 v1(3886,4404) 3912.63,4430.63 3972.13,4430.63 U1.7
  other v1: 3345,2601 3346,2650 3673,2827 3527,4001 3249,4019 3012,4583 4308,4590
  other v3: 2772,1634 2772,1703 2773,1765
IMU_CS: R6.1 U3.22 U5.88 | length 2993.8
  Top Layer w10: v1(3235,2960) 3230,2960 3195,2995 3195,3110 3435,3350 3435,4359 3558,4482 3558,4540 3628.75,4610.75 3779.25,4610.75 3800,4590 3800,4505 3771.46,4476.46 R6.1 3744.21,4465.67 U3.22@3744.21,4342.34 ; v1(3685,3025) 3720,3060 U5.88
  Bottom Layer w10: v1(3235,2960) 3235,2955 3262.5,2927.5 3647.5,2927.5 3672.5,2952.5 3672.5,2997.5 3685,3010 v1(3685,3025)
IMU_FSYNC: U3.11 U5.97 | length 1502.3
  Top Layer w10: U5.97 3542.83,3782.83 3670,3910 3670,3940 3645,3965 3645,4093.74 3660.63,4109.37 v2(3652,4118) ; U3.11 3784.9,4133.1 3799,4119 3847.99,4119 3874.49,4145.51 3875,4145 v3(3905,4145)
  Bottom Layer w10: v2(3652,4118) 3680.74,4118 3689.37,4109.37 3690,4110 3700,4100 3865,4100 3905,4140 v3(3905,4145)
IMU_INT: U3.12 U5.98 | length 1558.2
  Top Layer w10: U5.98 3523.15,3808.15 3590,3875 3590,4125 3605,4140 v2(3605,4160) ; U3.12 3804.9,4149.1 3812.36,4141.64 3829.64,4141.64 3853.51,4165.51 3867.07,4165.51 v3@3896.57,4195 ; v3(3910,4195) v3@3896.57,4195 ; v3@3896.57,4195 3903.28,4201.72 3898.28,4196.72 v3@3896.57,4195
  Bottom Layer w10: v2(3605,4160) 3668.28,4160 3708.28,4120 3830,4120 v3@3899.22,4189.22
IMU_SCK: R5.1 U3.23 U5.89 | length 2468.9
  Top Layer w10: v1(3290,2960) 3290,3000 3235,3055 3235,3090 3485,3340 3485,4323 3547.75,4385.75 3604.25,4385.75 3610,4380 v1(3600,4380) ; v1(3655,4415) 3660,4410 3724.21,4410 ; v1(3670,3070) 3700.32,3100.32 U5.89 ; R5.1 3724.21,4447.25 3724.21,4410 ; U3.23 3724.21,4410
  Bottom Layer w10: v1(3290,2960) 3435,2960 3500,3025 3625,3025 v1(3670,3070) ; v1(3600,4380) 3635,4380 3655,4400 v1(3655,4415)
IMU_SDI: R4.1 U3.24 U5.91 | length 2392.2
  Top Layer w10: v1(3230,3005) 3230,3000 3215,3015 3215,3100 3460,3345 3460,4338 3598.46,4476.46 R4.1 3635,4438.48 3624.25,4427.74 3624.25,4402.26 3657.52,4369 3689.21,4369 3704.34,4360.66 U3.24 ; v1(3615,3065) 3660.94,3110.94 U5.91
  Bottom Layer w10: v1(3230,3005) 3451.72,3005 3491.72,3045 3595,3045 v1(3615,3065)
IMU_SDO: U3.9 U5.90 | length 1120.1
  Top Layer w10: U5.90 3680.63,3205.63 3705,3230 v1(3740,3230) ; v1(3715,3335) 3725,3335 3725,3656.57 3770.75,3702.32 3770.75,3885.77 3744.07,3912.45 U3.9
  Bottom Layer w10: v1(3715,3335) 3715,3275 3740,3250 v1(3740,3230)
MAIN_CLOCK: U1.47 U2.3 | length 284.9
  Top Layer w10: U2.3 3710,4655 v1(3765,4655)
  Bottom Layer w10: U1.47 3707.76,4587.76 3765,4645 v1(3765,4655)
NetC9_2: C9.2 U3.10 | length 190.1
  Top Layer w10: 3765.14,4111 U3.10 ; 3766,4111 3787,4090 C9.2
NetC26_1: C26.1 R13.1 X1.1 | length 410.7
  Bottom Layer w10: R13.1@3483.68,3318.46 3483.68,3480 3548.25,3480.43 C26.1@3548.25,3665
NetC28_2: C28.2 U5.73 | length 230.5
  Top Layer w10: U5.73 4081.85,3051.85 ; 4081.85,3052.17 4125.43,3095.74 C28.2
NetC29_2: C29.2 U5.49 | length 227.3
  Top Layer w10: U5.49 3936.54,2443.46 3959.57,2420.43 C29.2
NetDP1_1: DP1.1 P1.17 P1.19 P1.21 | length 395.7
  Top Layer w10: DP1.1@4453.39,5130 DP1.1
  Top Layer w19.68: P1.17 P1.19 P1.21 DP1.1@4453.39,5130
NetDP2_1: DP2.1 U7.V_BUS | length 241.9
  Bottom Layer w10: U7.V_BUS@2906.46,2210 3006.46,2210 DP2.1
NetJ3_2: J3.2 U6.7 | length 212.4
  Top Layer w10: J3.2 4186.57,1678.57 4210,1702 U6.7
NetJ3_3: J3.3 U6.6 | length 232.5
  Top Layer w10: J3.3 4088.15,1645.15 4160,1717 U6.6
NRST: C24.1 R12.2 S1.1 S1.2 U5.14 | length 1452.5
  Top Layer w10: v1(3345,2715) v1(3345,2820) 3360,2820 3375.32,2835.32 U5.14 ; v1(3390,2400) 3390,2250 3425.43,2214.57 C24.1 3553.43,2214.57 S1.1 3592,2113 3625,2080 R12.2 3676.54,2038.46 3685,2030 3795,2030 3848,2083 S1.2 S1.2@3836,2176
  Bottom Layer w10: v1(3345,2715) 3375,2715 3420,2670 3420,2550 3390,2520 v1(3390,2400)
OSC_IN: C25.1 U5.12 X1.2 | length 1406.3
  Top Layer w10: v1(3305,2885) 3315.32,2874.68 U5.12
  Bottom Layer w10: v1(3305,2885) 3315,2895 3705,2895 3780,2970 3780,3250 3770,3260 3770,3326.77 3923.23,3480 X1.2 4035.43,3480 C25.1
OSC_OUT: R13.2 U5.13 | length 782.8
  Top Layer w10: v1(3280,2850) 3280.75,2850.75 3350.75,2850.75 3355,2855 U5.13
  Bottom Layer w10: v1(3280,2850) 3280,2866.52 3195,2951.52 3195,3100 3346.54,3251.54 R13.2
SWCLK: J2.3 U5.76 | length 368
  Top Layer w10: U5.76@3957.44,3152.24 4010,3204.8 4010,3235 4045,3270 4220,3270 4227.5,3277.5 4241.57,3263.43 J2.3
SWIO: J2.2 U5.72 | length 287.8
  Top Layer w10: U5.72 4097.17,3032.17 4230,3165 J2.2
USB_N: J1.2 U5.70 | length 1532.5
  Top Layer w10: U5.70 4082.2,2992.8 v2(4170,2905)
  Bottom Layer w15: J1.2 3716.5,1866.5 4065,2215 4065,2866 4104,2905 v2(4170,2905)
USB_P: J1.3 R14.1 U5.71 | length 2500.5
  Top Layer w10: U5.71 4147.52,3012.48 v2(4170,2990)
  Top Layer w15: R14.1 3810,1575 3975,1740 v2(4010,1740)
  Bottom Layer w15: v2(4010,1740) 3975,1740 3860,1625 3740,1625 3685,1680 J1.3 3685,1875 4040,2230 4040,2915 4115,2990 v2(4170,2990)
USB_RXD: U5.69 U7.70 | length 913.8
  Top Layer w10: U5.69 4071.89,2973.11 4125,2920 4125,2883 4148,2860 4215,2860 4435,3080 v2(4440,3080)
  Bottom Layer w10: v2(4440,3080) 4440,3010 4490,2960 4610,2960 U7.70
USB_SCL: U7.20
USB_SDA: U7.40
USB_TXD: U5.68 U7.71 | length 831.8
  Top Layer w10: U5.68 4061.57,2953.43 4090,2925 4090,2884 4138,2836 4219.28,2836 4389.28,3006 4445,3006 4499,3060 4615,3060 4660,3105 U7.71
VBAT: C2.2 C3.2 C4.2 C5.2 C8.2 C10.2 C11.1 C12.1 C15.2 C16.2 C17.2 C20.2 C22.2 C23.2 C31.1 DP1.2 LM1.1 R1.2 R2.2 R3.2 R4.2 R5.2 R6.2 R7.1 R8.1 R9.1 R10.1 R12.1 U1.1 U1.6 U1.8 U1.10 U1.14 U1.28 U2.1 U2.4 U3.1 U3.8 U3.13 U4.6 U4.8 U5.6 U5.11 U5.19 U5.21 U5.22 U5.28 U5.50 U5.75 U5.100 UP1.2 UP1.4 | length 16082.8
  Top Layer w10: v2(3180,3895) 3263.46,3895 R1.2 3265,3895.05 3315.05,3845 3360,3845 v1(3395,3880) ; U5.22 3487.83,2677.83 ; U5.21 3472.52,2697.52 3530,2755 3840,2755 3860,2775 v1(3900,2775) ; U5.19 3486.89,2736.89 3500,2750 3500,2830 v1(3490,2840) 3490,2875 3470.63,2894.37 U5.11 ; U5.100 3483.78,2986.22 ; 3486.89,2678.78 3487.83,2677.83 ; v1(3495,2975) 3483.78,2986.22 ; v1(3625,4345) 3595,4315 C8.2 ; R4.2@3633.54,4535 R4.2 R5.2 R6.2 v1(3755,4580) ; U3.1 3606.44,4309.9 C8.2 ; U3.8 3724.21,4120.79 3700.78,4120.79 3692,4129.57 3692,4134.57 3635,4191.57 3635,4258.46 C8.2 ; R12.1 3743.46,2198.46 3800,2255 4060,2255 4095,2290 4095,2435 4050,2480 3985,2480 3957.44,2507.56 U5.50@3957.44,2557.76 ; U3.13 3869.34,4209.34 3902,4242 v1@3902,4289.57 ; C2.2 3839.57,4584.57 3870,4615 3950,4615 3990,4655 v1(3990,4725) ; v1(3902,4291) v1@3902,4289.57 ; v1(3925,3055) 3940,3055 3977.44,3092.44 4017.24,3092.44 4044.8,3120 v1(4090,3120) ; U5.50 3956.22,2603.78 3919.57,2640.43 v1(3905.43,2640.43) 3903.15,2638.15 v1(3523.15,2638.15) ; C3.2 3984.57,4604.57 v2(4105,4725) ; v1(4105,4790) 4151.54,4743.46 4151.54,4641.54 ; U4.6 4137.2,4447.2 ; v1(4230,2950) 4260,2950 4390,3080 4390,3650 4505,3765 4730,3765 4740,3775 4740,4630 4785,4675 4785,4810 4705,4890 4405,4890 v2(4340,4955) ; v2(4230,4195) 4230,4185.43 C4.2 ; v2@4338.39,4958.39 DP1.2 ; R7.1@4430,4515 4430,4580 4350,4660 4170,4660 4151.54,4641.54 ; R9.1 R8.1 R7.1 ; 3483.78,2986.22 3477.2,2992.8 U5.6 3383.35,2992.8 3318.05,2927.5 3297.5,2927.5 3235,2865 v1(3235,2851.52) 3300,2786.52 3300,2555 3360,2495 3506.3,2495 3523.15,2511.85 U5.28 v1(3523.15,2638.15) ; 3487.83,2677.83 3523.15,2642.52 v1(3523.15,2638.15) ; v1@3902,4289.57 3960,4231.57 4041.54,4231.54 4115,4305 4115,4425 4137.2,4447.2 ; 4137.2,4447.2 4120,4464.41 4120,4485 4133.39,4498.39 U4.8 4153.5,4558.04 C11.1 C12.1 4151.54,4641.54
  Bottom Layer w10: LM1.1 3125.63,4039.37 3180,3985 v2(3180,3895) 3180,3815 3055,3690 3055,3565 3167,3453 3167,2928 3235,2860 v1(3235,2851.52) 3297.26,2789.25 3488.82,2789.25 C22.2 v1(3490,2840) ; v1(3395,3880) 3475,3880 3525,3930 3644.76,3930 ; v1(3495,2975) 3500,2970 C15.2 ; v1(3523.15,2638.15) 3539.57,2654.57 C20.2 ; v1(3625,4345) 3805,4345 3859,4291 v1(3902,4291) ; U1.28 3644.76,3930 ; C5.2 C5.2@3644.76,3880.67 ; v1(3755,4580) 3965,4790 v1(4105,4790) ; U1.1 3770.75,4535.75 3960,4725 v1(3990,4725) v2(4105,4725) ; v1(3905.43,2640.43) C23.2 C16.2 C17.2 3905.43,3045.43 3915,3055 v1(3925,3055) ; U1.6 4027.87,4477.13 4030,4475 ; R2.2 R3.2 3928.46,3778.46 3910.32,3760.32 3819.63,3760.32 3744.95,3835 3650.43,3835 3650.43,3850 3644.76,3855.67 C5.2@3644.76,3880.67 ; U1.14 4119.05,4212.76 4126.81,4205 4220,4205 v2(4230,4195) 4230,4275 4166.26,4338.74 4030,4338.74 ; U1.10 4030,4338.74 ; U1.8 4028.27,4401.73 4030,4400 ; v1(4090,3120) 4110,3120 4230,3000 v1(4230,2950) ; v2(4340,4955) 4335,4955 v2(4105,4725) ; C5.2@3644.76,3880.67 3644.76,3930 ; 4030,4338.74 4030,4400 ; 4030,4400 4030,4475 ; 4030,4475 4030,4650 v2(4105,4725)
VCC: R14.2
VCCA: C6.2 C7.2 LM1.2 U1.35 U1.39 U1.40 | length 960.9
  Bottom Layer w10: C7.2 3180.43,4398.7 LM1.2 LM1.2@3208.9,4370.24 ; C6.2 3215,4364.13 LM1.2@3208.9,4370.24 ; U1.35 3442.24,4212.76 3415.67,4239.33 3415.67,4283.19 3415,4283.86 3415,4340.24 3445,4370.24 ; U1.39 U1.40 3445,4370.24 ; LM1.2@3208.9,4370.24 3445,4370.24
pads on no net: J1. J1.1 P1.15 U1. U1.2 U1.3 U1.4 U1.5 U1.22 U1.26 U1.36 U1.37 U3.2 U3.3 U3.4 U3.5 U3.6 U3.7 U3.14 U3.15 U3.16 U3.17 U3.19 U3.21 U3.P$1 U5.3 U5.4 U5.5 U5.7 U5.8 U5.9 U5.15 U5.16 U5.17 U5.18 U5.23 U5.24 U5.25 U5.26 U5.29 U5.30 U5.31 U5.32 U5.33 U5.34 U5.35 U5.36 U5.37 U5.38 U5.39 U5.40 U5.41 U5.42 U5.43 U5.44 U5.45 U5.46 U5.55 U5.56 U5.57 U5.58 U5.59 U5.60 U5.61 U5.62 U5.63 U5.64 U5.65 U5.66 U5.67 U5.83 U5.84 U5.85 U5.92 U5.93 U6.5 U7.2 U7.4 U7.5 U7.6 U7.7 U7.8 U7.9 U7.10 U7.11 U7.26 U7.27 U7.28 U7.29 U7.30 U7.31 U7.32 U7.33 U7.34 U7.35 U7.36 U7.43 U7.44 U7.45 U7.46 U7.47 U7.48 U7.49 U7.50 U7.51 U7.52 U7.53 U7.54 U7.55 U7.56 U7.57 U7.58 U7.59 U7.62 U7.64 U7.65 U7.66 U7.72 U7.74 U7.76 U7.77 U7.78 U7.79 U7.NC U7.V_1.2v U7.V_3.3v U7.VIO

## Silkscreen, mask and mechanical layers (free items; w line width, h text height)
Top Overlay:
  lines w19.68: 2670.24,1440.71 2670.24,5219.76 2675,5215 4920,5215 4914.33,5209.33 4914.33,1440.71 2670.24,1440.71

## Text inside footprints (layer, text, board x,y; h text height)
P1: Bottom Overlay "1" at 3160,5150 h50 r180; Bottom Overlay "2" at 3160,5050 h50 r180; Bottom Overlay "21" at 4320,5150 h50 r180; Bottom Overlay "22" at 4320,5050 h50 r180
U3: Mechanical 16 "Z" at 3750.27,4236.77 h15.5; Mechanical 16 "X" at 3797.52,4276.14 h15.5; Mechanical 16 "Y" at 3730.59,4299.76 h15.5